# Altium PCB V2_PCB.PcbDoc
Units mm, origin at the board's own origin, x right, y up, seen from the top; angles counter-clockwise.
Board outline 100 x 100 mm, 2 copper layers (Top Layer, Bottom Layer); 22 components, 29 nets, 200 pads, 43 vias.
Unrouted connection lines stored in the file: 2.
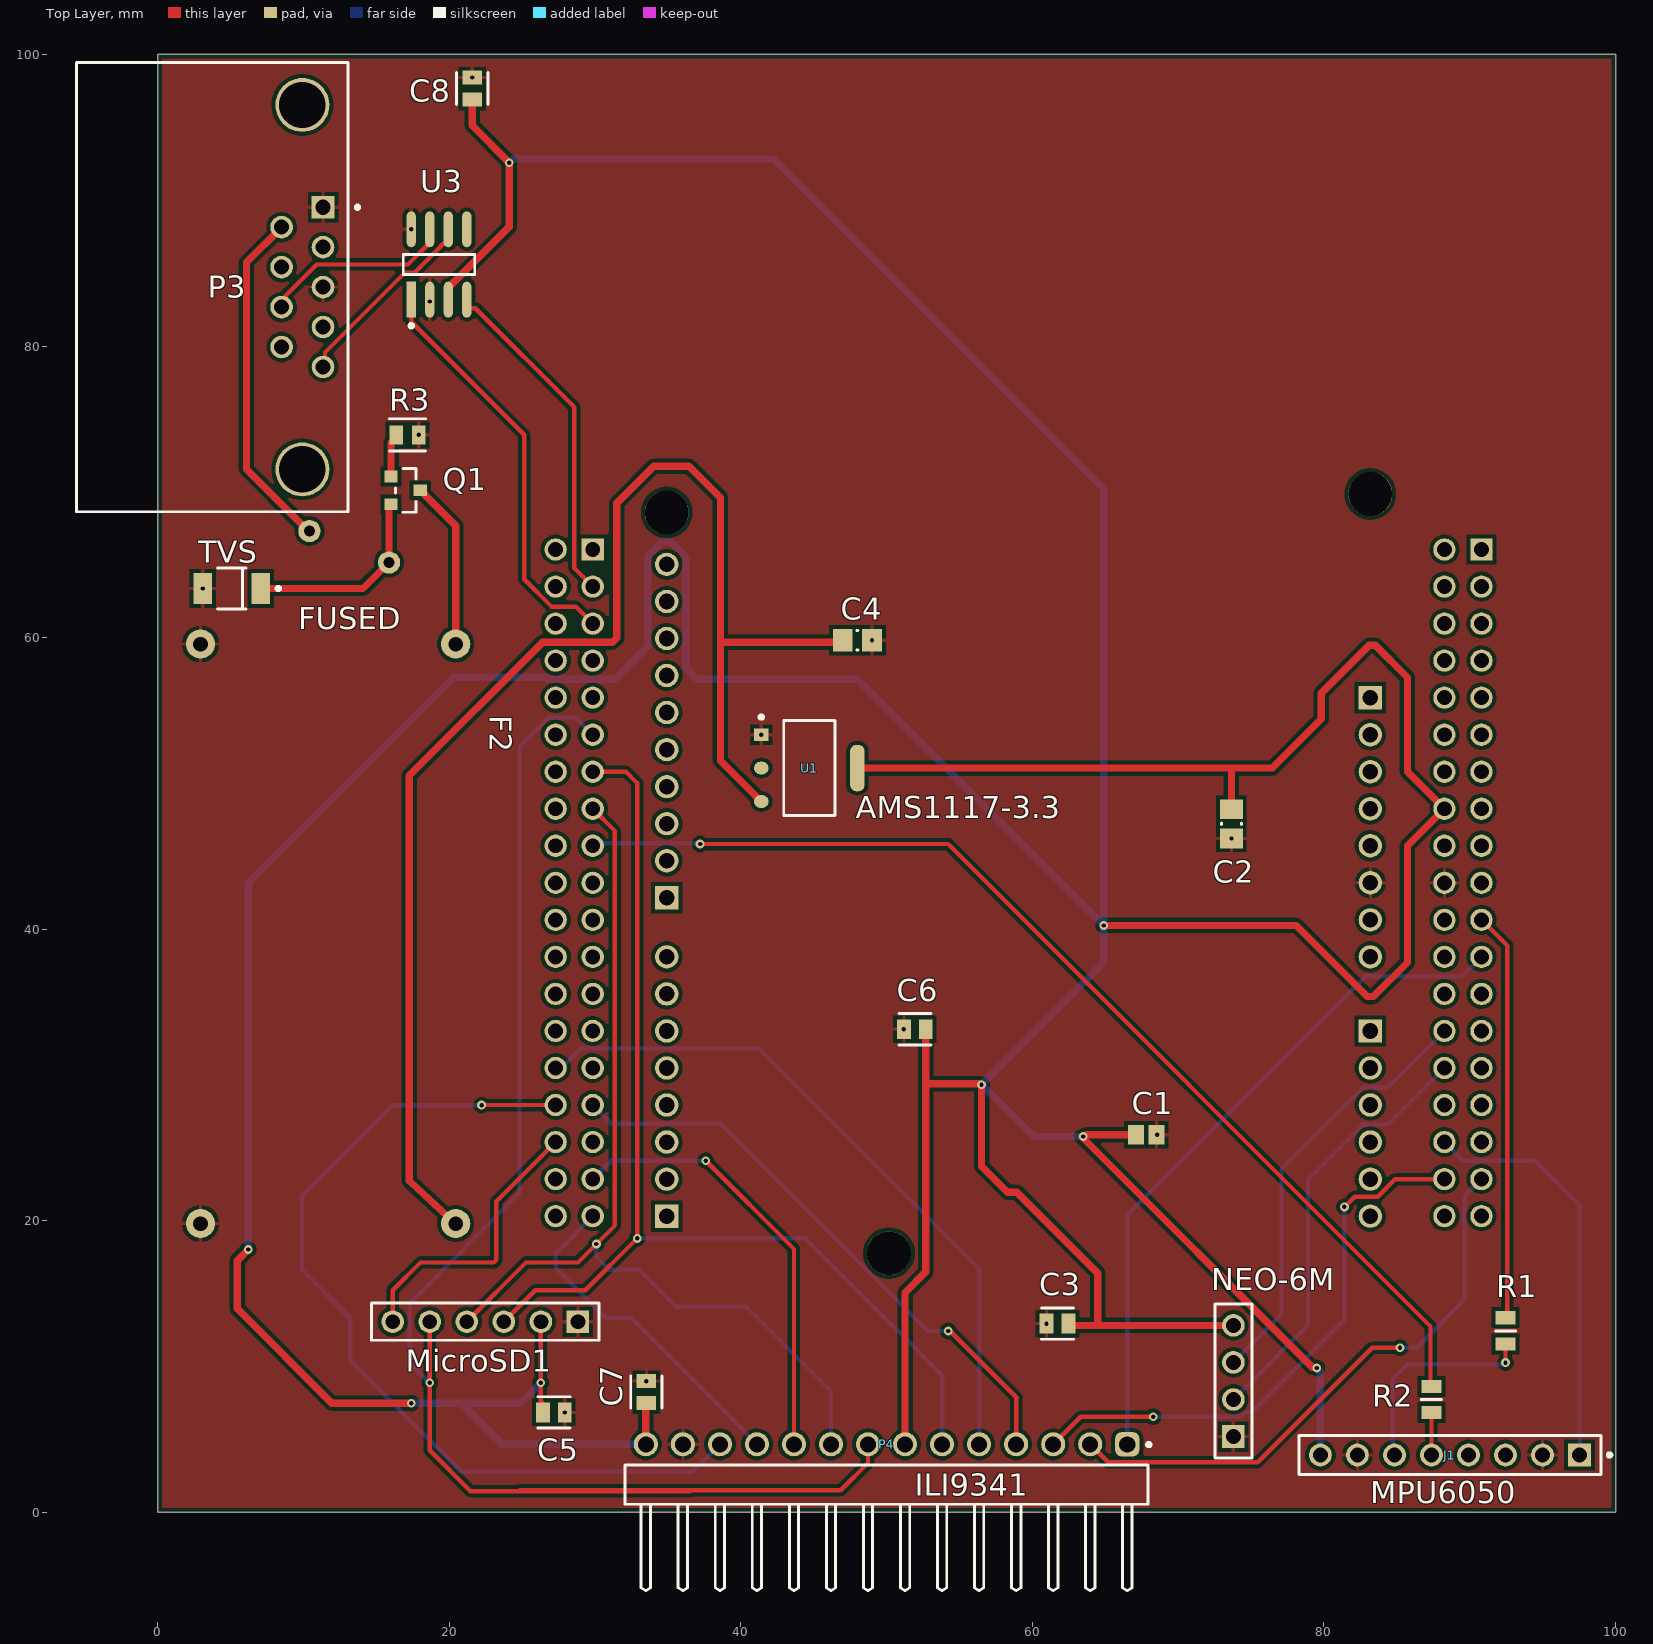
[diagram p0: Top Layer view]
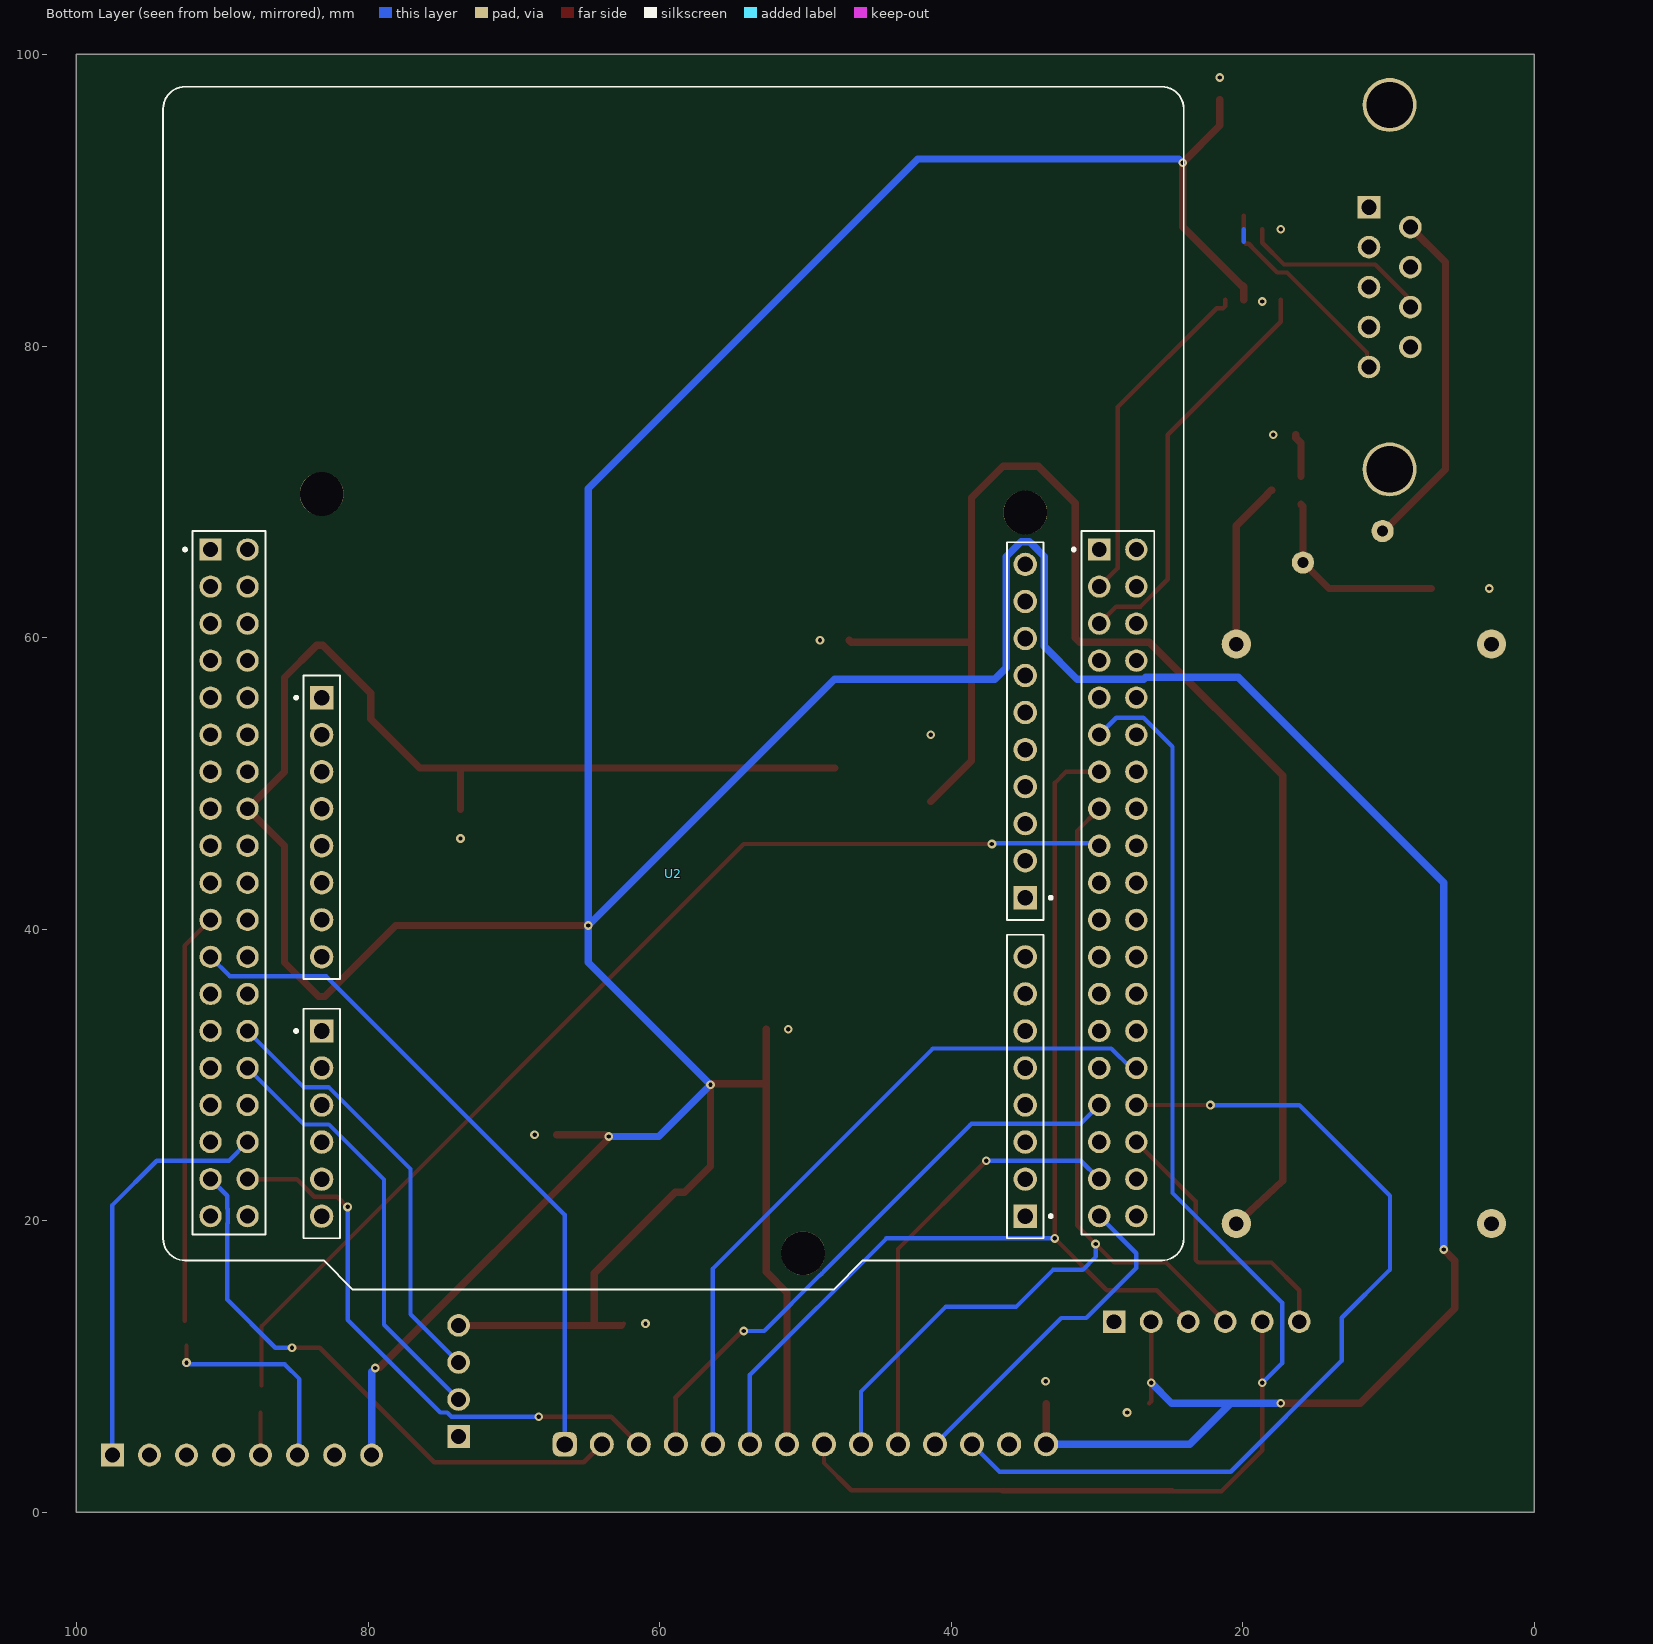
[diagram p1: Bottom Layer view, seen from below]
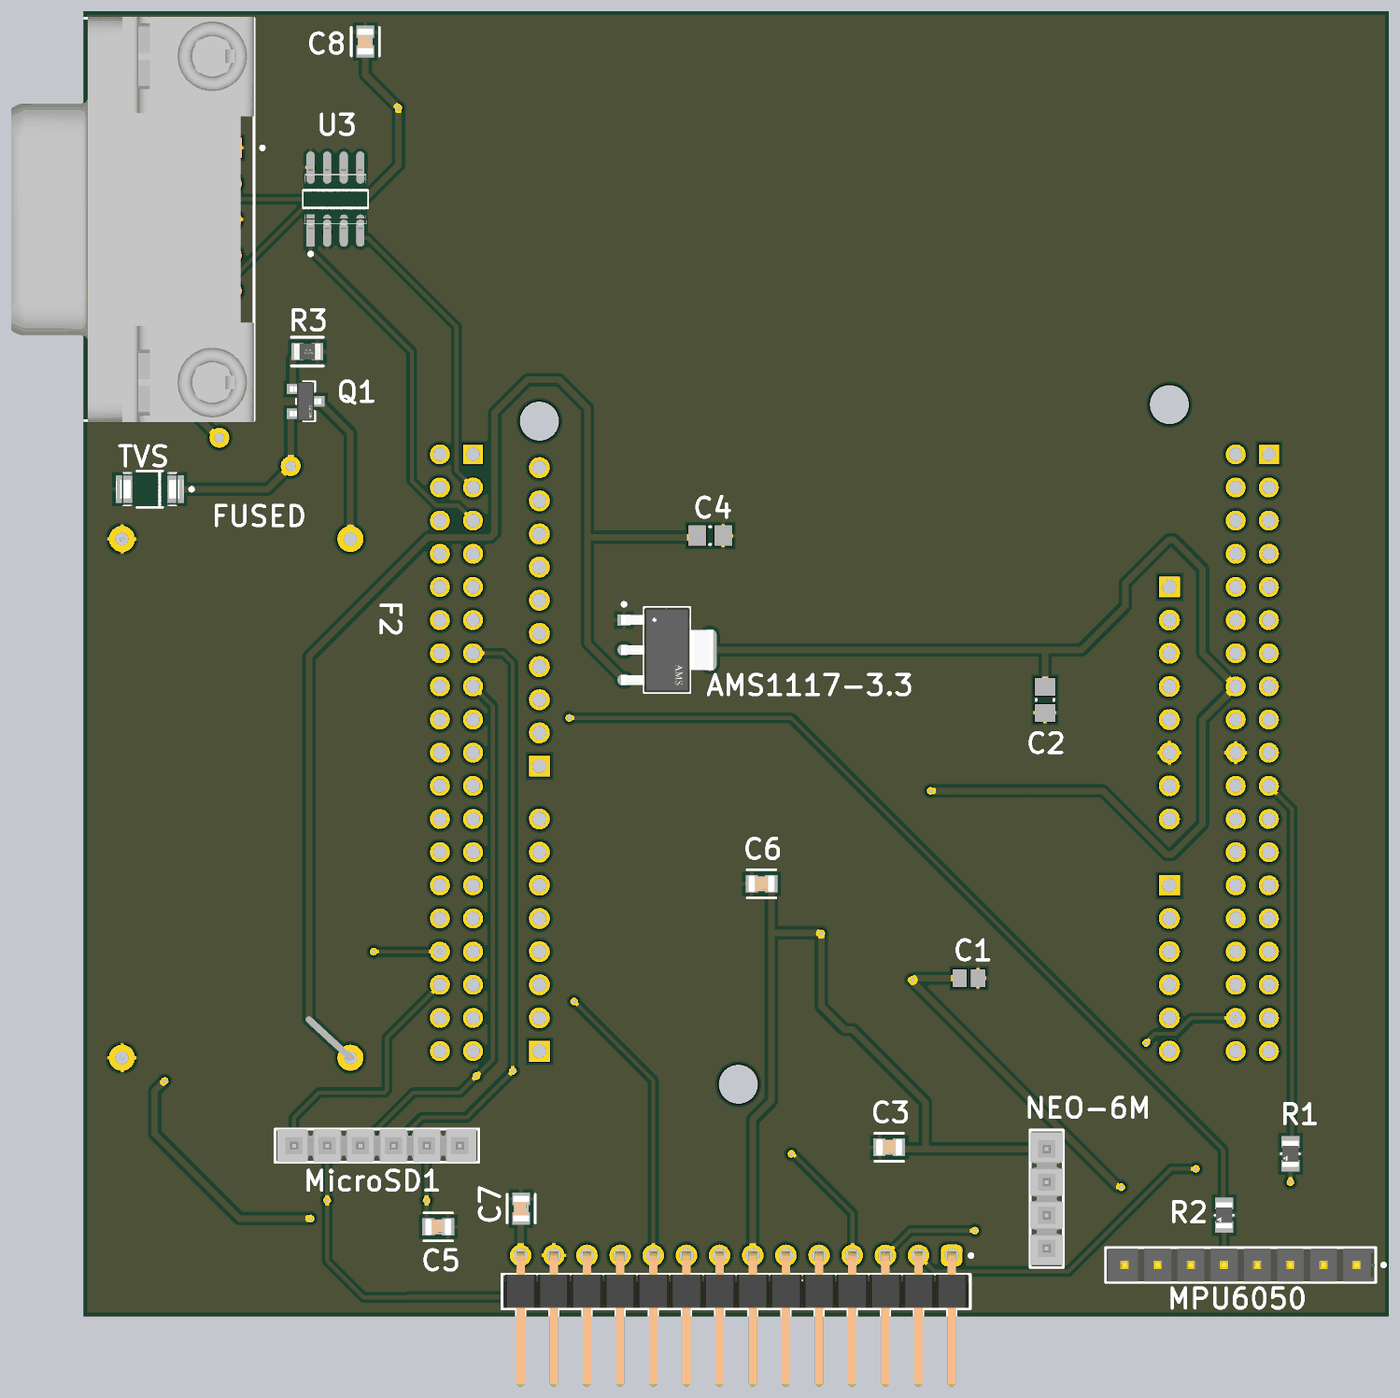
[diagram p2: 3D render of the assembled board from above, using the file's embedded part models]

## Layer stack, top to bottom
Top Solder: solder mask 0.0102, Solder Resist, Dk 3.5
Top Layer: signal copper 0.0356
Dielectric 1: dielectric 0.32, FR-4, Dk 4.8
Bottom Layer: signal copper 0.0356
Bottom Solder: solder mask 0.0102, Solder Resist, Dk 3.5

## Board outline
0,0 100,0 100,100 0,100

## Design rules (kind name [scope] priority, off if disabled: settings)
BoardOutlineClearance [All] p1: gap=0.3 ignorepadtopadclearanceinfootprint=FALSE
Clearance [All] p1: gap=0.254 ignorepadtopadclearanceinfootprint=FALSE
DiffPairsRouting [All] p1: maxlimit=0.254 minlimit=0.2 mostfreqgap=0.2 toplayer_minwidth=0.2 toplayer_maxwidth=0.381 toplayer_prefwidth=0.3 bottomlayer_minwidth=0.2 bottomlayer_maxwidth=0.381 bottomlayer_prefwidth=0.3 maxuncoupledlength=12.7
PolygonConnect [All] p1: connectstyle=Relief reliefconductorwidth=0.254 reliefentries=4 polygonreliefangle="90 Angle" airgapwidth=0.254
RoutingVias [All] p1: holewidth=0.3 width=0.6 viastyle="Through Hole" minholewidth=0.3 minwidth=0.6 maxholewidth=0.711 maxwidth=1.27
SilkToSilkClearance [All] p1: silktosilkclearance=0.153
SilkToSolderMaskClearance [IsPad] p1: minsilkscreentomaskgap=0.153 clearancetoexposedcopper=TRUE
SolderMaskExpansion [All] p1: expansion=0.102 istentingtop=FALSE
SupplyNets "Schematic Supply Nets" [InNet('GND')] p1: voltage=0.000
Width [All] p1: maxlimit=1 minlimit=0.2 preferedwidth=0.3 minimp=50.000000 maximp=50.000000 favimp=50.000000
27 further rules are at their usual default settings.

## Classes and differential pairs
component class V2_schematic: C1 C2 C3 C4 C5 C6 C7 C8 J1 MicroSD1 NEO-6M P3 P4 Q1 R2 R3 TVS U1 U2 U3

## Components (designator, comment, footprint, x,y, rotation, side; value= is the part's Value field where it differs from the comment)
C1 "C0805C104Z3VACTU" CAPC2013X88X50LL20T25 67.818,25.908 r180 top
C2 "CAP 10uF 16V 0805(2012)" CAPC0805(2012)145_M 73.66,47.228 r90 top value=10uF
C3 "C0805C103KARACAUTO" FP-C0805C-DN-MFG 61.722,12.954 r180 top value="10,000 pF"
C4 "CAP 10uF 16V 0805(2012)" CAPC0805(2012)145_M 48.006,59.817 r180 top value=10uF
C5 "C0805C103KARACAUTO" FP-C0805C-DN-MFG 27.178,6.858 r180 top value="10,000 pF"
C6 "C0805C103KARACAUTO" FP-C0805C-DN-MFG 51.943,33.147 r180 top value="10,000 pF"
C7 "C0805C103KARACAUTO" FP-C0805C-DN-MFG 33.528,8.255 r270 top value="10,000 pF"
C8 "C0805C103KARACAUTO" FP-C0805C-DN-MFG 21.59,97.663 r270 top value="10,000 pF"
F2 "Comment" "LM2596 Board" 20.447,59.562 r270 top locked
J1 "MPU6050" FP-TSW-108-08-G-S-MFG 88.646,3.937 r180 top
MicroSD1 "" SMTC-TSW-106-17-X-S-LL 28.829,13.081 r180 top locked
NEO-6M "NEO6M" SMTC-TSW-104-08-X-S 73.787,5.207 r90 top locked (schematic designator P1)
P3 "5747840-3" TECO-5747840-3_V 9.929,84.042 r270 top locked
P4 "ILI9341" 61301411021 50,1.905 r0 top
Q1 "DMG2305UX-13" FP-SOT23-MFG 17.018,70.104 r0 top locked
R1 "MCU08050D4701BP500" FP-MCU0805-MFG 92.456,12.457 r270 top
R2 "MCU08050D4701BP500" FP-MCU0805-MFG 87.376,7.747 r270 top
R3 "CRGP0805F10K" FP-CRGP0805-IPC_C 17.145,73.914 r0 top locked value=10KΩ
TVS "SMAJ15A" FP-SMA-MFG 5.08,63.373 r180 top (schematic designator 1)
U1 "AMS1117-3.3" FP-AMS1117-IPC_C 44.704,51.054 r0 top
U2 "NUCLEO-F446RE" MODULE_NUCLEO-F446RE 59.055,56.534 r180 bottom locked
U3 "SN65HVD230DR" FP-D0008A-IPC_A 19.304,85.598 r90 top

## Footprints (in the part's own frame and the unit in brackets; to place one, negate y for a bottom-side part, rotate by r counter-clockwise, add the part's x,y. Pads: shape width x height; smd on the part's side, far side on the other; paste and mask are expansions set on the pad)
61301411021 [mm] "Pin Header, pitch 2.54 mm, THT, Angled, single row, 14p"
  rrect50% 1.65x1.65 hole 1.1: 1(16.51,2.77)
  round 1.65 hole 1.1: 2(13.97,2.77) 3(11.43,2.77) 4(8.89,2.77) 5(6.35,2.77) 6(3.81,2.77) 7(1.27,2.77) 8(-1.27,2.77) 9(-3.81,2.77) 10(-6.35,2.77) 11(-8.89,2.77) 12(-11.43,2.77) 13(-13.97,2.77) 14(-16.51,2.77)
  silkscreen extent -17.93,-7.27 18.12,2.87, body extent -17.78,-7.27 17.78,3.09, height 2.58
CAPC0805(2012)145_M [mm] "Chip Capacitor, Body 2.0x1.2mm, Height 1.45mm, IPC Low Density"
  rect 1.35x1.55 smd: 1(-1,0) 2(1,0)
  silkscreen extent -0.05,-0.67 0.05,0.67, body extent -1.1,-0.72 1.1,0.72, height 1.45
CAPC2013X88X50LL20T25 [mm] "Chip Capacitor, 2-Leads, Body 2.00x1.25mm, IPC High Density"
  rect 1.1x1.35 smd: 1(-0.7,0) 2(0.7,0)
  body extent -1.1,-0.72 1.1,0.72, height 0.88
FP-AMS1117-IPC_C [mm]
  rect 1.004x0.872 smd paste+0 mask+0: 1(-3.295,2.29)
  rrect100% 1.004x0.872 smd paste+0 mask+0: 2(-3.295,0) 3(-3.295,-2.29)
  rrect87% 1.004x3.182 smd paste+0 mask+0: 4(3.295,0)
  silkscreen extent -3.42,-3.25 1.75,3.62, body extent -3.9,-3.35 3.9,3.35, height 0.25
FP-C0805C-DN-MFG [mm]
  rect 0.95x1.35 smd paste+0 mask+0: 1(-0.75,0) 2(0.75,0)
  silkscreen extent -1.1,-1.07 1.1,1.07, body extent -1.4,-0.85 1.4,0.85, height 0.25
FP-CRGP0805-IPC_C [mm]
  rect 0.906x1.31 smd paste+0 mask+0: 1(-0.776,0) 2(0.776,0)
  silkscreen extent -1.23,-1.1 1.23,1.1, body extent -1.33,-0.8 1.33,0.8, height 0.25
FP-D0008A-IPC_A [mm]
  rect 2.469x0.622 smd paste+0 mask+0: 1(-2.414,1.905)
  rrect100% 2.469x0.622 smd paste+0 mask+0: 2(-2.414,0.635) 3(-2.414,-0.635) 4(-2.414,-1.905) 5(2.414,-1.905) 6(2.414,-0.635) 7(2.414,0.635) 8(2.414,1.905)
  silkscreen extent -4.32,-2.45 0.68,2.45, body extent -4.15,-2.95 4.15,2.95, height 0.25
FP-MCU0805-MFG [mm]
  rect 0.9x1.4 smd paste+0 mask+0: 1(-0.9,0) 2(0.9,0)
  silkscreen extent 0,-0.7 0,0.7, body extent -1.45,-0.8 1.45,0.8, height 0.25
FP-SMA-MFG [mm]
  rect 1.27x2.1 smd paste+0 mask+0: 1(-1.985,0) 2(1.985,0)
  silkscreen extent -3.32,-1.4 0.97,1.4, body extent -2.72,-1.5 2.72,1.5, height 0.25
FP-SOT23-MFG [mm]
  rect 0.9x0.8 smd paste+0 mask+0: 1(-1,0.95) 2(-1,-0.95) 3(1,0)
  silkscreen extent -0.7,-1.5 0.7,1.5, body extent -1.55,-1.6 1.55,1.6, height 0.25
FP-TSW-108-08-G-S-MFG [mm]
  rect 1.57x1.57 hole 1.02 paste-2539.97 mask+0: 1(-8.89,0)
  round 1.57 hole 1.02 paste-2539.97 mask+0: 2(-6.35,0) 3(-3.81,0) 4(-1.27,0) 5(1.27,0) 6(3.81,0) 7(6.35,0) 8(8.89,0)
  silkscreen extent -11.08,-1.34 10.35,1.34, body extent -10.45,-1.44 10.45,1.44, height 0.25
"LM2596 Board" [mm]
  round 2 hole 1: IN+(0,0) IN-(0,-17.5) OUT+(39.75,0) OUT-(39.75,-17.5)
MODULE_NUCLEO-F446RE [mm]
  rect 1.605x1.605 / inner round 1.605 / far side rect 1.605x1.605 hole 1.07: CN5_1(24.13,-14.37) CN6_1(-24.13,-0.65) CN8_1(-24.13,-23.51) CN9_1(24.13,-36.21)
  round 1.605 hole 1.07: CN5_2(24.13,-11.83) CN5_3(24.13,-9.29) CN5_4(24.13,-6.75) CN5_5(24.13,-4.21) CN5_6(24.13,-1.67) CN5_7(24.13,0.87) CN5_8(24.13,3.41) CN5_9(24.13,5.95) CN5_10(24.13,8.49) CN6_2(-24.13,-3.19) CN6_3(-24.13,-5.73) CN6_4(-24.13,-8.27) CN6_5(-24.13,-10.81) CN6_6(-24.13,-13.35) CN6_7(-24.13,-15.89) CN6_8(-24.13,-18.43) CN8_2(-24.13,-26.05) CN8_3(-24.13,-28.59) CN8_4(-24.13,-31.13) CN8_5(-24.13,-33.67) CN8_6(-24.13,-36.21) CN9_2(24.13,-33.67) CN9_3(24.13,-31.13) CN9_4(24.13,-28.59) CN9_5(24.13,-26.05) CN9_6(24.13,-23.51) CN9_7(24.13,-20.97) CN9_8(24.13,-18.43)
  rect 1.53x1.53 / inner round 1.53 / far side rect 1.53x1.53 hole 1.02: CN7_1(-31.75,9.51) CN10_1(29.21,9.51)
  round 1.53 hole 1.02: CN7_2(-29.21,9.51) CN7_3(-31.75,6.97) CN7_4(-29.21,6.97) CN7_5(-31.75,4.43) CN7_6(-29.21,4.43) CN7_7(-31.75,1.89) CN7_8(-29.21,1.89) CN7_9(-31.75,-0.65) CN7_10(-29.21,-0.65) CN7_11(-31.75,-3.19) CN7_12(-29.21,-3.19) CN7_13(-31.75,-5.73) CN7_14(-29.21,-5.73) CN7_15(-31.75,-8.27) CN7_16(-29.21,-8.27) CN7_17(-31.75,-10.81) CN7_18(-29.21,-10.81) CN7_19(-31.75,-13.35) CN7_20(-29.21,-13.35) CN7_21(-31.75,-15.89) CN7_22(-29.21,-15.89) CN7_23(-31.75,-18.43) CN7_24(-29.21,-18.43) CN7_25(-31.75,-20.97) CN7_26(-29.21,-20.97) CN7_27(-31.75,-23.51) CN7_28(-29.21,-23.51) CN7_29(-31.75,-26.05) CN7_30(-29.21,-26.05) CN7_31(-31.75,-28.59) CN7_32(-29.21,-28.59) CN7_33(-31.75,-31.13) CN7_34(-29.21,-31.13) CN7_35(-31.75,-33.67) CN7_36(-29.21,-33.67) CN7_37(-31.75,-36.21) CN7_38(-29.21,-36.21) CN10_2(31.75,9.51) CN10_3(29.21,6.97) CN10_4(31.75,6.97) CN10_5(29.21,4.43) CN10_6(31.75,4.43) CN10_7(29.21,1.89) CN10_8(31.75,1.89) CN10_9(29.21,-0.65) CN10_10(31.75,-0.65) CN10_11(29.21,-3.19) CN10_12(31.75,-3.19) CN10_13(29.21,-5.73) CN10_14(31.75,-5.73) CN10_15(29.21,-8.27) CN10_16(31.75,-8.27) CN10_17(29.21,-10.81) CN10_18(31.75,-10.81) CN10_19(29.21,-13.35) CN10_20(31.75,-13.35) CN10_21(29.21,-15.89) CN10_22(31.75,-15.89) CN10_23(29.21,-18.43) CN10_24(31.75,-18.43) CN10_25(29.21,-20.97) CN10_26(31.75,-20.97) CN10_27(29.21,-23.51) CN10_28(31.75,-23.51) CN10_29(29.21,-26.05) CN10_30(31.75,-26.05) CN10_31(29.21,-28.59) CN10_32(31.75,-28.59) CN10_33(29.21,-31.13) CN10_34(31.75,-31.13) CN10_35(29.21,-33.67) CN10_36(31.75,-33.67) CN10_37(29.21,-36.21) CN10_38(31.75,-36.21)
  round 3 hole 3 unplated: ""(-24.13,13.32) ""(8.89,-38.75) ""(24.13,12.05)
  silkscreen extent -35,-41.25 35,41.25, body extent 81.91,-84.47 86.99,-79.39, height 0.25
SMTC-TSW-104-08-X-S [mm] ".025 SQ Post Terminal Strip Assembly, 1x4 Pins, Vertical, 2.54mm Pitch, Male"
  rect 1.55x1.55 hole 1.02: 1(0,0)
  round 1.55 hole 1.02: 2(2.54,0) 3(5.08,0) 4(7.62,0)
  silkscreen extent -1.46,-1.27 9.08,1.27, body extent -1.27,-1.27 8.89,1.27, height 8.38
SMTC-TSW-106-17-X-S-LL [mm] ".025 SQ Post Terminal Strip Assembly, 1x6 Pins, Vertical, 2.54mm Pitch, Male"
  rect 1.55x1.55 hole 1.02: 1(0,0)
  round 1.55 hole 1.02: 2(2.54,0) 3(5.08,0) 4(7.62,0) 5(10.16,0) 6(12.7,0)
  silkscreen extent -1.46,-1.27 14.16,1.27, body extent -1.27,-1.27 13.97,1.27, height 18.29
TECO-5747840-3_V [mm] "THD, 9-Leads, Body 30.81x18.62mm, Pitch 2.74mm"
  rect 1.55x1.55 hole 1.04: 1(-5.485,1.42)
  round 1.55 hole 1.04: 2(-2.745,1.42) 3(-0.005,1.42) 4(2.735,1.42) 5(5.475,1.42) 6(-4.115,-1.42) 7(-1.375,-1.42) 8(1.365,-1.42) 9(4.105,-1.42)
  round 3.7 hole 3.17: MH1(-12.495,0) MH2(12.495,0)
  silkscreen extent -15.4,-15.49 15.41,3.91, body extent -15.52,-15.48 15.52,3.12, height 12.77

## Part data
C1: library part CMP-2007-00284-1, Manufacturer=Kemet, Part Number=C0805C104Z3VACTU
C2 C4: library part CMP-1036-04931-1, "CAP 10uF 16V -20% to +80% 0805 (2012 Metric) Thickness 1.45mm SMD", Case-EIA=0805, Case-Metric=2012, Rated Voltage="16 V", Tolerance="-20% to +80%", Max Thickness="1.45 mm", Technology=SMT
C3 C5 C6 C7 C8: library part CMP-03020-020823-2, "CAP CER 10000PF 250V X7R 0805", Capacitance="10,000 pF", Manufacturer=KEMET, Package=C0805C-DN, Temperature="-55°C to +125°C", Temperature Characteristic=X7R, Temperature Coefficient=30ppm/°C, Temperature Range High=+125°C, Temperature Range Low=-55°C, Tolerance=0.1, Voltage Rating="250 V", Automotive=No, Category=Cap, ComponentLink2Description=Datasheet, ComponentLink2URL=https://content.kemet.com/datasheets/KEM_C1003_C0G_SMD.pdf, Device Class L1="Passive Components", Device Class L2=Capacitors, Device Class L3="Ceramic Capacitors", Digikey Description="CAP CER 10000PF 250V X7R 0805", Height=0.88mm, Ipc Land Pattern Name=CAPC200125X78, Lead Free=Yes, Manufacturer Part Number=C0805C103KARACAUTO, Material=Ceramic, Mouser Description="Multilayer Ceramic Capacitors MLCC - SMD/SMT 250volts 0.01uF 10% X7R AUTO", Octopart=https://octopart.com/c0805c103karacauto-kemet-31031912, RoHS=TRUE
F2: library part LM2596
J1: library part CMP-02766-000001-1, "CONN HEADER VERT 8POS 2.54MM", Manufacturer=Samtec, Manufacturer Part Number=TSW-108-08-G-S, Temperature="-55°C to +125°C", Temperature Range High=+125°C, Temperature Range Low=-55°C, Automotive=No, Category=Conn, ComponentLink2Description=Datasheet, ComponentLink2URL=http://suddendocs.samtec.com/catalog_english/tsw_th.pdf, Conn Gender=Male, Conn Orientation=Straight, Contact Material=Gold,Nickel, Device Class L1=Connectors, Device Class L2="Headers and Wire Housings", Device Class L3=unset, Digikey Description="CONN HEADER VERT 8POS 2.54MM", Footprint Url=http://suddendocs.samtec.com/prints/tsw-xxx-xx-x-x-xx-xxx-footprint.pdf, Height=8.71mm, Lead Free=Yes, Mouser Description="TSW - Samtec 2.54mm Pin Header 13.46mm Overall Pin Length 5.08mm Tail", Number Of Contacts=8, Number Of Rows=1, Octopart=https://octopart.com/tsw-108-08-g-s-samtec-272653, Package=TSW-108-08-G-S, Pitch=2.54mm, RoHS=TRUE
MicroSD1: library part CMP-1024-00391-1, "0.025\" SQ Post Header, Through-hole, Vertical, -55 to 125 degC, 2.54 mm Pitch, 6-Pin, Male, RoHS", Manufacturer=Samtec, PartNumber=TSW-106-17-G-S-LL, Temperature Range="-55 to 125 degC", ComponentLink1Description="Manufacturer URL", ComponentLink1URL=http://www.samtec.com, ComponentLink2Description=Datasheet, ComponentLink2URL=http://www.samtec.com/documents/webfiles/pdf/TSW_TH.PDF, ComponentLink3Description="Package Specification", ComponentLink3URL=http://www.samtec.com/documents/webfiles/cpdf/TSW-XXX-XX-XXX-X-XX-XXX-MKT.pdf, DatasheetVersion=F-214, Mounting Technology=Through-hole, Orientation=Vertical, PackageDescription=".025[0.64] SQ. Post Terminal Strip Assembly", PackageReference=TSW-106-17-X-S-LL, PackageVersion="DM, 8/1988", Pitch="2.54 mm", RoHS=True
NEO-6M: library part CMP-1024-00357-1, "0.025\" SQ Post Header, Through-hole, Vertical, -55 to 125 degC, 2.54 mm Pitch, 4-Pin, Male, RoHS", Manufacturer=Samtec, PartNumber=TSW-104-08-G-S, Temperature Range="-55 to 125 degC", ComponentLink1Description="Manufacturer URL", ComponentLink1URL=http://www.samtec.com, ComponentLink2Description=Datasheet, ComponentLink2URL=http://www.samtec.com/documents/webfiles/pdf/TSW_TH.PDF, ComponentLink3Description="Package Specification", ComponentLink3URL=http://www.samtec.com/documents/webfiles/cpdf/TSW-XXX-XX-XXX-X-XX-XXX-MKT.pdf, DatasheetVersion=F-214, Mounting Technology=Through-hole, Orientation=Vertical, PackageDescription=".025[0.64] SQ. Post Terminal Strip Assembly", PackageReference=TSW-104-08-X-S, PackageVersion="DM, 8/1988", Pitch="2.54 mm", RoHS=True
P3: library part CMP-2000-05647-1, "Male D-Sub Connector, Pitch 2.74 mm, 2 Row, 9 Position, Height 12.93 mm, Tail Length 3.17 mm, -55 to 105 degC, RoHS, Tray", Color=Black, Current Rating=6A, Manufacturer="TE Connectivity", Operating Temperature=-55°C~105°C, Package Description="Male D-Sub Connector, Pitch 2.74 mm, 2 Row, 9 Position, Height 12.93 mm, Tail Length 3.17 mm", Standard Package=130, Voltage Rating=125V, 3D Model=5747840-3.pdf, Catalog Drawings=AMPD-SubMale.318, Category=Connectors,Interconnects, Connector Style=D-Sub, Connector Type=Plug,MalePins, Contact Finish=Gold, Contact Finish Thickness=Flash, Contact Type=Signal, Datasheet URL=http://www.te.com/commerce/DocumentDelivery/DDEController?Action=srchrtrv&DocNm=5747840&DocType=Customer+Drawing&DocLang=English, Datasheet Version="Rev. D, 01/2013", Dynamic Catalog=AMPLIMITEHD-20Series, Family=D-SubConnectors, Featured Product=AMPLIMITED-SubminiatureConnectors, Features=BoardLock,GroundStrap,GroundingIndents, Flange Feature=Housing/Shell(4-40), Manufacturer URL=http://www.te.com/, Mating Products="5-747905-7-ND / -CONND-SUBRCPT9POSVERTSLD / 5-787355-1-ND / -CONNRCPT9POSVERTSOLDERCUP / 5746861-4-ND / -CONNRECEPT9POSGOLDIDC / A32510-ND / -CONND-SUBRCPT9POSSLDCUPAU / AFL09B-ND / -CONND-SUBRECEPT9POS30GOLD / A31975-ND / -CONND-SUBRECEPT9P22-26AWGAU / A31974-ND / -CONND-SUBRECEPT9P20-22AWGAU / A31973-ND / -CONND-SUBRECEPT9P26-30AWGAU / A31931-ND / -CONND-SUBRCPT9POS22-26AWGAU", Mounting Technology=ThroughHole, Mounting Type=ThroughHole,RightAngle, Number of Positions=9, Number Of Rows=2, Other Names=A32091, Package Reference=5747840-3, Product Training Modules=AMPLIMITED-SubConnectors, RoHS Information=5747840-3StatementofCompliance, Series=AMPLIMITEHD-20, Shell Material, Finish=Steel,TinPlated, Shell Size, Connector Layout=1(DE,E), Termination=Solder
P4: library part CMP-1502-01090-4, "THT Angled Pin Header WR-PHD, Pitch 2.54 mm, Single Row, 14 pins", Color=Black, Contact Resistance=20mΩ, Current Rating=3A, Operating Supply Voltage=250V, Connector Type="Male Pin", Contact Material=Copper, Contact Mating Length=5.9944mm, Contact Plating=Gold, Gender=Male, Lead Pitch=2.54mm, Mount="Through Hole", Number Of Contacts=14, Number of Pins=14, Number of Positions=14, Number Of Rows=1, Packaging=Bulk, Pitch=2.54mm, RoHS=Compliant, Termination=Solder
Q1: library part CMP-12801-000021-1, "MOSFET P-CH 20V 4.2A SOT23", Continuous Drain Current=-4.2A, Drain To Source Breakdown Voltage=-20V, Drain To Source Resistance=40mΩ, Gate To Source Voltage=8V, Input Capacitace At Vds="808pF @ -15V", Manufacturer="Diodes Inc.", Max Junction Temp=+150°C, Package=SOT23, Power Dissipation=1.4W, Pulse Drain Current=-15A, Temperature="-55°C to +150°C", Temperature Range Low=-55°C, Automotive=No, Category=Trans, ComponentLink2Description=Datasheet, ComponentLink2URL=https://www.diodes.com/assets/Datasheets/DMG2305UX.pdf, Depletion Mode=False, Device Class L1="Discrete Semiconductors", Device Class L2=Transistors, Device Class L3=MOSFETs, Digikey Description="MOSFET P-CH 20V 4.2A SOT23", Drain To Source Voltage=-20V, Footprint Url=https://www.diodes.com/assets/Package-Files/SOT23.pdf, Gate Charge At Vgs="10.2nC @ -4.5V", Height=1.1mm, Ipc Land Pattern Name=SOT92P240X102-3, Lead Free=Yes, Manufacturer Part Number=DMG2305UX-13, Mouser Description="MOSFET P-Ch ENH FET -20V 52mOhm -5.0V", Number Of Channels=1, Number Of P Channels=1, Octopart=https://octopart.com/dmg2305ux-13-diodes+inc.-29925594, RoHS=TRUE, Rthja Max=90°C/W, Standoff Height=0.013mm, Temperature Range High=+150°C, Threshold Vgs Max=-0.9V, Threshold Vgs Min=-0.5V, Turn Off Delay Time=79.3ns, Turn On Delay Time=10.8ns
R1 R2: library part CMP-02407-001466-1, "RES 1.05K OHM 0.5% 1/5W 0805", Case/Package=0805, Max Operating Temperature=125°C, Max Power Dissipation=125mW, Min Operating Temperature=-55°C, Package Quantity=5000, Resistance=4.7kR, Temperature Coefficient=25ppm/°C, Tolerance=0.1%, Composition="Thin Film", Depth=1.25mm, Height=0.022inch, Lead Free="Lead Free", Length=0.079inch, Military Standard=Not, Number of Terminations=2, Packaging="Tape and Reel", Width=0.049inch
R3: library part CMP-03211-006861-1, "CRGP 0805 10K 1%", Ambient Temperature Range High=+70°C, Manufacturer=TE, Package=CRGP0805, Power Rating=0.33W, Resistance=10KΩ, Temperature="-55°C to +155°C", Temperature Coefficient=±100ppm/°C, Temperature Range High=+155°C, Temperature Range Low=-55°C, Tolerance=0.01, Voltage Rating=150V, Automotive=No, Category=Res, ComponentLink2Description=Datasheet, ComponentLink2URL=https://www.mouser.com/datasheet/2/418/NG_DS_9-1773463-9_A-1358566.pdf, Composition="Thick Film", Device Class L1="Passive Components", Device Class L2=Resistors, Device Class L3="Chip SMD Resistors", Digikey Description="CRGP 0805 10K 1%", Height=0.65mm, Ipc Land Pattern Name=RESC200125X55, Lead Free=Yes, Manufacturer Part Number=CRGP0805F10K, Octopart=https://octopart.com/crgp0805f10k-te+connectivity-91018782, RoHS=TRUE, Series=CRGP
TVS: library part CMP-07401-000026-1, "TVS DIODE 15V 24.4V SMA", Breakdown Voltage=16.7V, Clamping Voltage=24.4V, Manufacturer="Bourns Inc.", Max Junction Temp=+150°C, Package=SMA, Peak Pulse Current=16.4A, Peak Pulse Power=400W, Reverse Standoff Voltage=15V, Temperature="-55°C to +150°C", Temperature Range Low=-55°C, Automotive=No, Category=Diode, ComponentLink2Description=Datasheet, ComponentLink2URL=https://www.bourns.com/docs/Product-Datasheets/SMAJ.pdf, Device Class L1="Circuit Protection", Device Class L2="TVS Diodes", Device Class L3=unset, Digikey Description="TVS DIODE 15V 24.4V SMA", Direction=Unidirectional, Height=2.29mm, Lead Free=Yes, Manufacturer Part Number=SMAJ15A, Mouser Description="Bourns Smaj15a / Diode Tvs 15v 400w Uni 5% Smd Bourns", Number Of Channels=1, Octopart=https://octopart.com/smaj15a-bourns-12809353, RoHS=TRUE, Temperature Range High=+150°C
U1: library part CMP-209535-000001-1, "LDO Voltage Regulators 1A, 3.3V", Dropout Voltage=1.1V, Manufacturer="Advanced Monolithic Systems", Max Junction Temp=+125°C, Max Power Dissipation=1.2W, Max Supply Voltage=15V, Nominal Supply Current=5mA, Output Current=1A, Output Voltage=3.3V, Package=AMS1117, Temperature="-40°C to +125°C", Temperature Range Low=-40°C, Automotive=No, Category=IC, ComponentLink2Description=Datasheet, ComponentLink2URL=http://www.advanced-monolithic.com/pdf/ds1117.pdf, Device Class L1="Integrated Circuits (ICs)", Device Class L2="Power Management ICs", Device Class L3="Voltage Regulators - Linear", Height=1.8mm, Ipc Land Pattern Name=SOT229P700X180-4, Lead Free=Yes, Manufacturer Part Number=AMS1117-3.3, Number Of Outputs=1, Octopart=https://octopart.com/ams1117-3.3-advanced+monolithic+systems-25899300, Output Type=Fixed, RoHS=TRUE, Standoff Height=0.64mm, Temperature Range High=+125°C
U2: "STM32F446RE, mbed-Enabled Development Nucleo-64 STM32F4 ARMÂ® CortexÂ®-M4 MCU 32-Bit Embedded Evaluation Board", Package=None, Check_prices=https://www.snapeda.com/parts/NUCLEO-F446RE/STMicroelectronics/view-part/?ref=eda, MF=STMicroelectronics, MP=NUCLEO-F446RE, SnapEDA_Link=https://www.snapeda.com/parts/NUCLEO-F446RE/STMicroelectronics/view-part/?ref=snap
U3: library part CMP-0315-00015-3, "IC TRANSCEIVER HALF 1/1 8SOIC", Case/Package=D, Max Operating Temperature=85°C, Max Supply Current=17mA, Max Supply Voltage=3.6V, Min Operating Temperature=-40°C, Min Supply Voltage=3V, Operating Supply Voltage=3.3V, Package Quantity=1, Contact Plating=Gold, Data Rate=1Mbps, Lead Free="Lead Free", Nominal Supply Current=17mA, Number of Drivers=1, Number of I/Os=2, Number of Pins=8, Number of Receive Buffers=1, Number of Receivers=1, Number of Transceivers=1, Number of Transmit Buffers=1, Packaging="Tape and Reel", Radiation Hardening=No, REACH SVHC="No SVHC", Termination=SMD/SMT, Weight=0.002561oz

## Free pads (board coordinates)
  round 1.524 hole 0.762: 3(10.414,67.31) 4(15.875,65.151) 5(88.265,43.184)

## Via types
v1: diameter 0.6, hole 0.3, Top Layer to Bottom Layer, 43 vias

## Nets (pads, with @x,y where several pads share a name; then routed paths per layer and width w, separated by ;. In a path a pad name is that pad's centre, name@x,y a point inside that pad or via, vN(x,y) a via of type N, cw(c..) or ccw(c..) an arc to the next point about the centre after c; other vN are vias at no path point)
GND: C1.1 C2.1 C3.2 C4.1 C5.1 C6.2 C7.1 C8.1 F2.IN- F2.OUT- J1.2 J1.7 MicroSD1.1 NEO-6M.1 P3.1 P3.3 P4.13 pad.5 R3.2 TVS.2 U1.1 U2.CN6_6 U2.CN7_20 U3.2 U3.8 | length 0.1
  Top Layer w0.3: v1(17.907,73.914) R3.2 ; v1(51.181,33.147) C6.2 ; C1.1 v1(68.58,25.908)
  Top Layer w0.5: F2.IN-@2.934,59.575 v1(2.947,59.562) ; C8.1 v1(21.59,98.425)
  other v1: 82.296,3.937 94.996,3.937 36.03,4.675 73.787,5.207 27.94,6.858 33.528,9.005 60.972,12.954 28.829,13.081 2.947,19.812 73.66,46.228 41.409,53.344 49.006,59.817 3.095,63.373 18.669,83.058 11.349,84.047 17.399,88.011 11.349,89.527
Net1_1: P3.6 pad.3 pad.4 Q1.2 TVS.1 | length 37.3
  Top Layer w0.5: TVS.1 14.097,63.373 pad.4 15.875,69.011 Q1.2 ; P3.6 6.096,85.744 6.096,71.559 pad.3@10.379,67.275
NetC1_2: C1.2 C2.2 C3.1 C5.2 C6.1 C7.2 C8.2 J1.8 MicroSD1.2 NEO-6M.4 P4.7 P4.14 U1.4 U2.CN7_16 U3.3 | length 471
  Top Layer w0.3: MicroSD1.2 v1(26.289,8.89) 26.289,7.632 C5.2@26.428,7.493 ; C7.2@33.49,7.467 C7.2 ; C3.1 C3.1@62.599,12.827 ; v1(63.5,25.781) 63.581,25.781 v1@63.708,25.908 ; 79.191,9.963 79.445,9.963 v1(79.502,9.906)
  Top Layer w0.5: v1(6.223,18.034) 5.458,17.269 5.458,13.983 11.948,7.493 v1(17.399,7.493) ; U3.3 19.939,84.075 19.995,84.131 20.08,84.131 24.13,88.182 v1(24.13,92.583) 21.59,95.123 C8.2 ; P4.14 C7.2@33.49,7.467 ; U1.4 73.66,51.054 ; P4.7 51.27,15.075 52.694,16.499 C6.1 ; 52.694,29.394 v1@56.458,29.394 ; v1(56.515,29.337) 56.515,23.749 58.293,21.971 58.928,21.971 64.489,16.41 64.489,12.827 ; C3.1@62.611,12.827 64.489,12.827 ; v1@63.373,25.781 79.191,9.963 ; v1@63.708,25.908 C1.2@67.056,25.908 ; v1@65.024,40.259 78.105,40.259 82.978,35.386 83.392,35.386 85.73,37.724 85.73,45.729 U2.CN7_16 85.73,50.799 85.73,57.272 83.519,59.483 83.105,59.483 79.819,56.197 79.819,54.419 76.454,51.054 73.66,51.054 ; C2.2 73.66,51.054 ; NEO-6M.4 64.489,12.827
  Bottom Layer w0.3: v1(79.502,9.906) 79.756,9.652
  Bottom Layer w0.5: v1(6.223,18.034) 6.223,43.18 20.32,57.277 26.657,57.277 26.781,57.153 31.369,57.153 33.619,59.403 33.619,65.565 34.488,66.435 34.633,66.58 35.217,66.58 36.231,65.565 36.231,57.945 37.024,57.153 48.003,57.153 v1(64.897,40.259) ; v1(17.399,7.493) 20.828,7.493 ; v1(24.13,92.583) 24.384,92.837 42.291,92.837 64.897,70.231 v1(64.897,40.259) ; v1(26.289,8.89) 24.892,7.493 20.828,7.493 ; P4.14 23.646,4.675 20.828,7.493 ; v1@63.373,25.781 60.071,25.781 v1(56.515,29.337) 64.897,37.719 v1(64.897,40.259) ; J1.8 79.756,9.652
NetC4_2: C4.2 F2.OUT+ U1.3 | length 99
  Top Layer w0.5: F2.OUT+ 17.272,22.733 17.272,50.546 26.419,59.693 30.371,59.693 30.374,59.69 31.203,59.69 31.496,59.983 31.496,69.215 34.036,71.755 36.449,71.755 38.608,69.596 38.608,59.69 ; U1.3 38.608,51.565 38.608,59.69 ; C4.2 46.879,59.69 38.608,59.69
NetJ1_1: J1.1 U2.CN7_34 | length 28.2
  Bottom Layer w0.3: U2.CN7_34 89.539,24.13 94.488,24.13 97.536,21.082 J1.1
NetJ1_5: J1.5 R2.2 | length 2.9
  Top Layer w0.3: J1.5 R2.2
NetJ1_6: J1.6 R1.2 | length 14.7
  Top Layer w0.3: v1(92.456,10.276) R1.2@92.456,11.43
  Bottom Layer w0.3: J1.6 84.709,4.064 84.709,9.144 85.725,10.16 v1@92.583,10.16
NetMicroSD1_3: MicroSD1.3 P4.6 U2.CN10_13 | length 75.7
  Top Layer w0.3: MicroSD1.3 25.908,15.24 29.337,15.24 v1(32.893,18.796) 32.893,50.038 32.129,50.802 29.847,50.802 U2.CN10_13
  Bottom Layer w0.3: v1(32.893,18.796) 44.45,18.796 53.81,9.436 P4.6
NetMicroSD1_4: MicroSD1.4 P4.9 U2.CN10_15 | length 66.6
  Top Layer w0.3: MicroSD1.4 25.273,17.145 28.829,17.145 v1(30.099,18.415) 31.369,19.685 31.369,46.74 U2.CN10_15 ; P4.9 P4.9@46.209,4.694
  Bottom Layer w0.3: v1(30.099,18.415) 30.099,17.526 30.988,16.637 33.02,16.637 35.56,14.097 40.386,14.097 46.19,8.293 P4.9
NetMicroSD1_5: MicroSD1.5 P4.8 U2.CN10_11 | length 107.5
  Top Layer w0.3: MicroSD1.5 v1(18.669,8.89) 18.669,4.26 21.468,1.461 36.506,1.461 36.569,1.524 ; 24.847,1.524 36.569,1.524 ; P4.8 48.73,3.391 46.863,1.524 36.569,1.524
  Bottom Layer w0.3: v1@18.653,8.89 17.308,10.235 17.308,14.387 24.828,21.907 24.828,52.521 26.821,54.513 28.676,54.513 U2.CN10_11
NetMicroSD1_6: MicroSD1.6 U2.CN10_34 | length 19.9
  Top Layer w0.3: MicroSD1.6 16.129,15.24 18.034,17.145 23.065,17.145 23.241,17.321 23.241,21.34 U2.CN10_34
NetP1_2: NEO-6M.2 U2.CN7_30 | length 29.7
  Bottom Layer w0.3: NEO-6M.2 78.91,12.87 78.91,22.835 82.685,26.61 84.391,26.61 U2.CN7_30
NetP1_3: NEO-6M.3 U2.CN7_28 | length 29.7
  Bottom Layer w0.3: NEO-6M.3 77.089,13.589 77.089,23.554 82.685,29.15 84.391,29.15 U2.CN7_28
NetP2_3: F2.IN+ Q1.3 | length 11.6
  Top Layer w0.5: Q1.3 18.068,70.104 18.318,69.854 18.318,69.804 20.447,67.675 F2.IN+
NetP3_1: P3.5 U3.6 | length 15.3
  Top Layer w0.3: P3.5 11.488,78.706 11.488,79.561 16.971,85.044 17.636,85.044 19.384,86.792 19.384,86.815 19.595,87.026 19.79,87.026 19.939,87.175 U3.6@19.939,88.935
  Bottom Layer w0.3: 19.939,87.157 19.939,88.012
NetP3_8: P3.8 U3.7 | length 13.2
  Top Layer w0.3: P3.8 8.748,82.916 8.748,83.424 10.922,85.598 17.179,85.598 18.669,87.088 U3.7
NetP4_1: P4.1 U2.CN7_23 | length 47.4
  Bottom Layer w0.3: P4.1 66.51,20.409 82.879,36.778 89.479,36.778 U2.CN7_23
NetP4_2: P4.2 U2.CN7_35 | length 39.6
  Top Layer w0.3: P4.2 65.199,3.446 75.455,3.446 83.312,11.303 v1(85.217,11.303)
  Bottom Layer w0.3: v1(85.217,11.303) 86.36,11.303 89.662,14.605 89.662,19.814 89.636,19.84 89.636,20.808 89.662,20.834 89.662,21.721 U2.CN7_35
NetP4_3: P4.3 U2.CN7_36 | length 38.9
  Top Layer w0.3: P4.3 63.323,6.568 v1(68.29,6.568) ; v1(81.407,20.955) 82.109,21.657 83.685,21.657 84.891,22.864 v1(88.265,22.864)
  Bottom Layer w0.3: v1(68.29,6.568) 74.275,6.568 74.565,6.858 75.057,6.858 81.407,13.208 v1(81.407,20.955)
NetP4_4: P4.4 U2.CN10_31 | length 40.5
  Top Layer w0.3: v1@54.367,12.435 58.928,7.874 58.909,7.855 58.909,4.694 P4.4
  Bottom Layer w0.3: U2.CN10_31 31.119,26.67 38.608,26.67 38.696,26.582 48.659,16.619 ccw(c50.165,17.784) 49,16.278 52.832,12.446 v1(54.229,12.446)
NetP4_5: P4.5 U2.CN10_30 | length 47.9
  Bottom Layer w0.3: U2.CN10_30 27.541,30.481 27.665,30.481 29.031,31.817 34.925,31.817 41.259,31.817 56.35,16.726 P4.5
NetP4_10: P4.10 U2.CN10_35 | length 30.2
  Top Layer w0.3: v1(37.592,24.13) 43.65,18.072 P4.10
  Bottom Layer w0.3: U2.CN10_35 31.111,24.13 v1(37.592,24.13)
NetP4_11: P4.11 U2.CN10_37 | length 23.4
  Bottom Layer w0.3: U2.CN10_37 27.305,17.784 27.305,16.764 30.734,13.335 32.45,13.335 P4.11
NetP4_12: P4.12 U2.CN10_32 | length 61.9
  Top Layer w0.3: v1@22.227,27.942 U2.CN10_32@27.303,27.942
  Bottom Layer w0.3: v1@22.227,27.942 v1(22.225,27.94) 16.129,27.94 9.906,21.717 9.906,16.657 13.209,13.355 13.209,10.413 20.828,2.794 36.689,2.794 P4.12 ; U2.CN10_32@27.303,27.942 v1(27.305,27.944)
NetQ1_1: Q1.1 R3.1 | length 3
  Top Layer w0.5: Q1.1 16.018,73.361 16.369,73.712 R3.1
NetR1_1: R1.1 U2.CN7_21 | length 28.2
  Top Layer w0.3: U2.CN7_21 92.583,38.866 R1.1@92.583,13.14
NetR2_1: R2.1 U2.CN10_17 | length 75.3
  Top Layer w0.3: v1(37.211,45.847) 54.227,45.847 87.312,12.762 R2.1@87.312,8.711
  Bottom Layer w0.3: U2.CN10_17 30.032,45.91 37.066,45.91 37.13,45.847 v1(37.211,45.847)
NetU2_CN10_12: U2.CN10_5 U3.1 | length 28.3
  Top Layer w0.3: U3.1 17.399,81.661 25.146,73.914 25.146,64.01 27.023,62.133 28.676,62.133 U2.CN10_5
NetU2_CN10_14: U2.CN10_3 U3.4 | length 23.5
  Top Layer w0.3: U3.4 21.209,82.748 21.358,82.599 21.795,82.599 28.575,75.819 28.575,64.774 U2.CN10_3
pads on no net: J1.3 J1.4 P3.2 P3.4 P3.7 P3.9 P3.MH1 P3.MH2 U1.2 U2. U2.CN5_1 U2.CN5_2 U2.CN5_3 U2.CN5_4 U2.CN5_5 U2.CN5_6 U2.CN5_7 U2.CN5_8 U2.CN5_9 U2.CN5_10 U2.CN6_1 U2.CN6_2 U2.CN6_3 U2.CN6_4 U2.CN6_5 U2.CN6_7 U2.CN6_8 U2.CN7_1 U2.CN7_2 U2.CN7_3 U2.CN7_4 U2.CN7_5 U2.CN7_6 U2.CN7_7 U2.CN7_8 U2.CN7_9 U2.CN7_10 U2.CN7_11 U2.CN7_12 U2.CN7_13 U2.CN7_14 U2.CN7_15 U2.CN7_17 U2.CN7_18 U2.CN7_19 U2.CN7_22 U2.CN7_24 U2.CN7_25 U2.CN7_26 U2.CN7_27 U2.CN7_29 U2.CN7_31 U2.CN7_32 U2.CN7_33 U2.CN7_37 U2.CN7_38 U2.CN8_1 U2.CN8_2 U2.CN8_3 U2.CN8_4 U2.CN8_5 U2.CN8_6 U2.CN9_1 U2.CN9_2 U2.CN9_3 U2.CN9_4 U2.CN9_5 U2.CN9_6 U2.CN9_7 U2.CN9_8 U2.CN10_1 U2.CN10_2 U2.CN10_4 U2.CN10_6 U2.CN10_7 U2.CN10_8 U2.CN10_9 U2.CN10_10 U2.CN10_12 U2.CN10_14 U2.CN10_16 U2.CN10_18 U2.CN10_19 U2.CN10_20 U2.CN10_21 U2.CN10_22 U2.CN10_23 U2.CN10_24 U2.CN10_25 U2.CN10_26 U2.CN10_27 U2.CN10_28 U2.CN10_29 U2.CN10_33 U2.CN10_36 U2.CN10_38 U3.5

## Polygon pours and split planes (outlines as drawn)
GND on Top Layer "GND_L01_P002" (solid, pour order 2): -0.091,0.025 99.909,0.025 99.909,100.025 -0.091,100.025

## Silkscreen, mask and mechanical layers (free items; w line width, h text height)
Top Overlay:
  text "FUSED" at 9.652,60.579 h1.52